# EAGLE board da7_pcb (EAGLE 9.3.2)
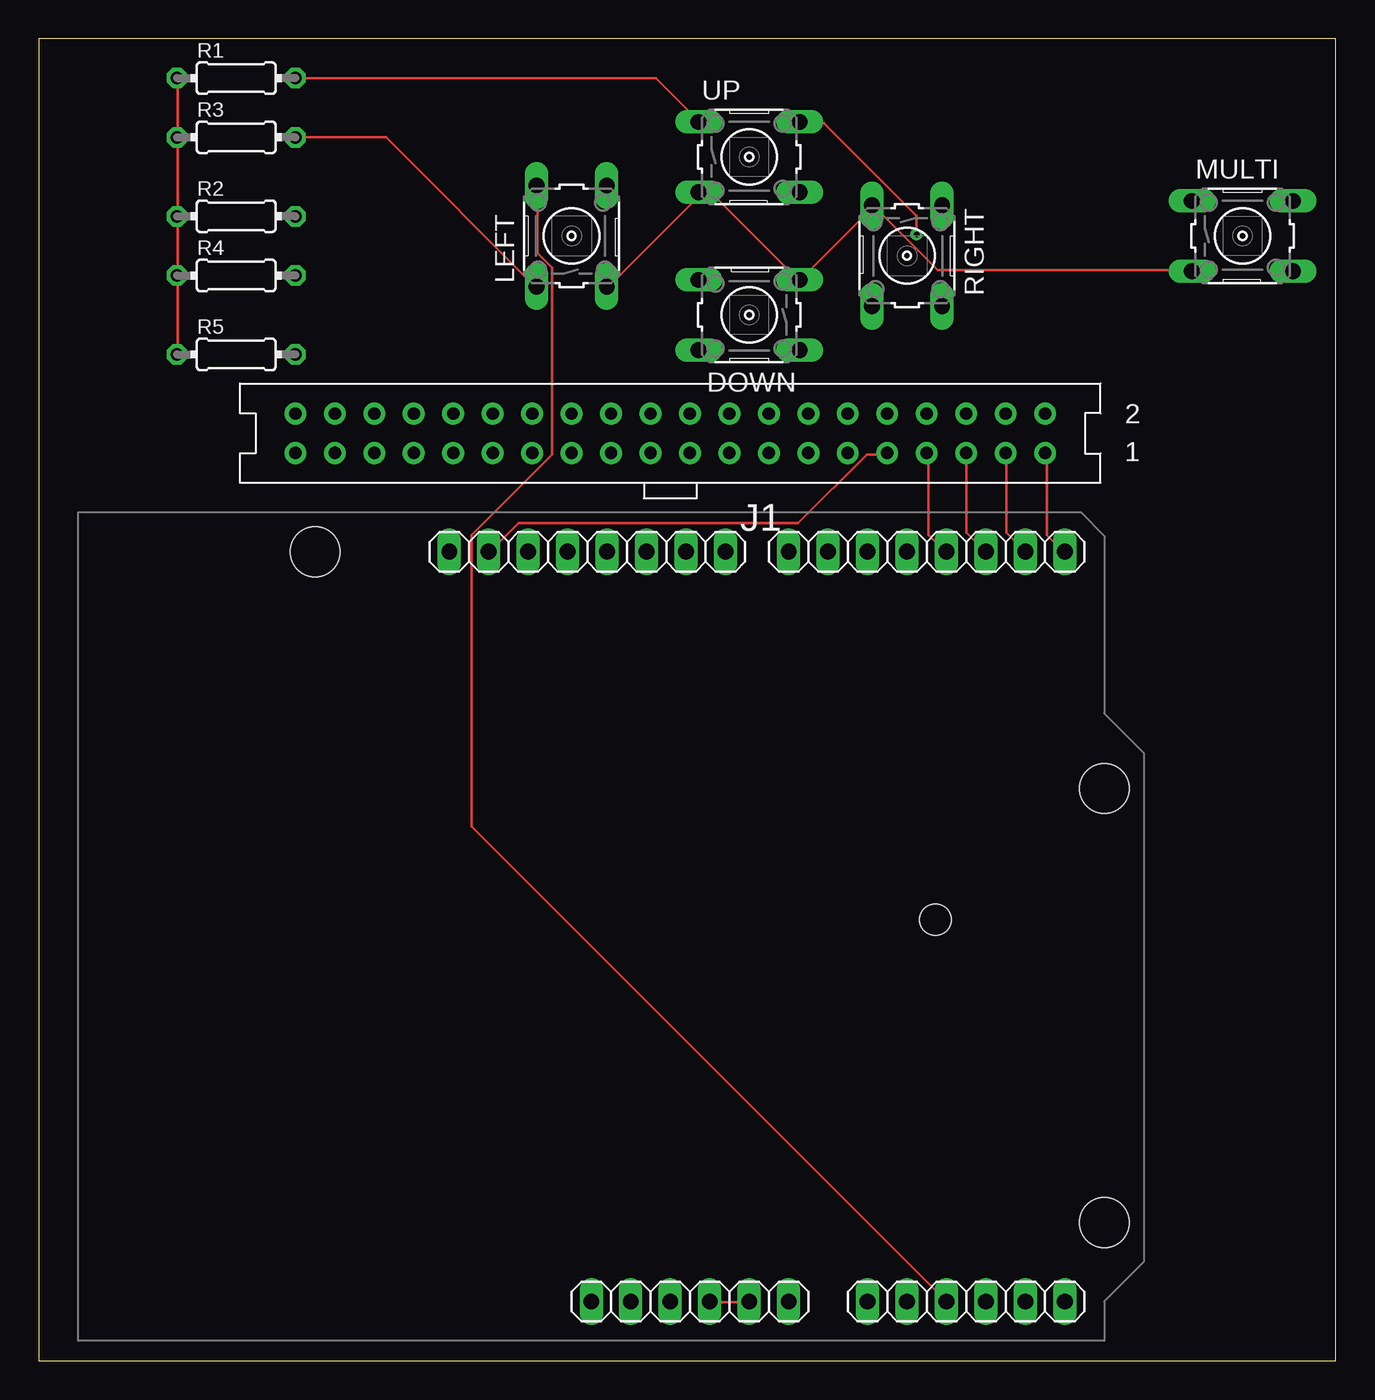
[diagram p0: board, top side]
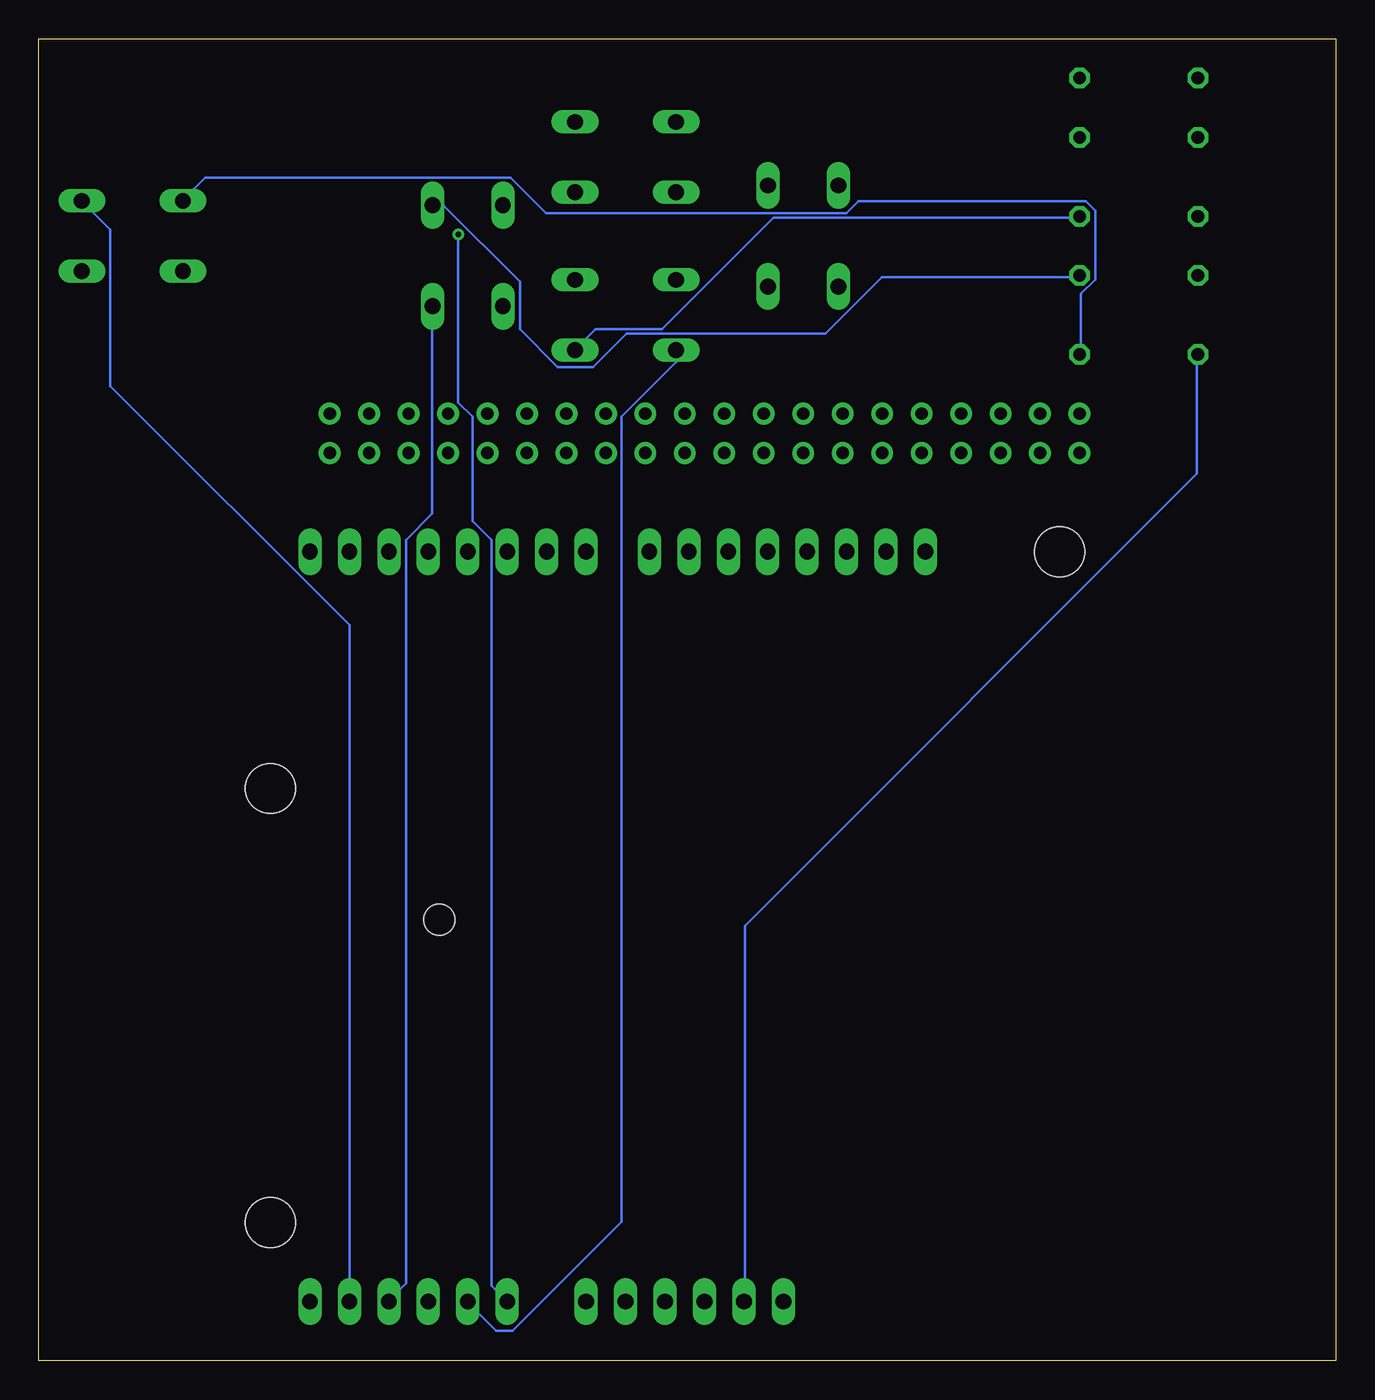
[diagram p1: board, bottom side, seen from below]

Size 83.49 x 85.08 mm. Coordinates in mm from the lower left corner, seen from the top.
Outline: 0,0 83.49,0 83.49,85.08 0,85.08 0,0
Copper layers (1*16): Top 0.035mm / dielectric 1.5mm / Bottom 0.035mm
Design rules "default": minimum track width 6mil, minimum drill 0.35mm, track to track 6mil, track to pad 6mil, pad to pad 6mil, via to via 6mil, smd to smd 6mil, copper to edge 40mil, drill to drill 6mil, minimum pad ring 10mil, minimum via ring 8mil, stop-mask expansion 4mil, vias tented up to drill 0mil, thermal gap 10mil

## Footprints (pad centres in the part's own frame; a part is rotated, then mirrored left to right if it is on the bottom)
B3F-10XX = drill 1.016 long: 1 -3.251,2.261; 2 3.251,2.261; 3 -3.251,-2.261; 4 3.251,-2.261
ARDUINO2009 = drill 1.016 long: 1 33.02,2.54; 2 35.56,2.54; 3 38.1,2.54; 4 40.64,2.54; 5 43.18,2.54; 6 45.72,2.54; 7 50.8,2.54; 8 53.34,2.54; 9 55.88,2.54; 10 58.42,2.54; 11 60.96,2.54; 12 63.5,2.54; 13 63.5,50.8; 14 60.96,50.8; 15 58.42,50.8; 16 55.88,50.8; 17 53.34,50.8; 18 50.8,50.8; 19 48.26,50.8; 20 45.72,50.8; 21 41.656,50.8; 22 39.116,50.8; 23 36.576,50.8; 24 34.036,50.8; 25 31.496,50.8; 26 28.956,50.8; 27 26.416,50.8; 28 23.876,50.8 | hole 3.2: 15.24,50.8; 66.04,35.56; 66.04,7.62 | hole 2: 55.17,27.114
S40V = drill 0.8 pad 1.4: 1 24.13,-1.27; 2 24.13,1.27; 3 21.59,-1.27; 4 21.59,1.27; 5 19.05,-1.27; 6 19.05,1.27; 7 16.51,-1.27; 8 16.51,1.27; 9 13.97,-1.27; 10 13.97,1.27; 11 11.43,-1.27; 12 11.43,1.27; 13 8.89,-1.27; 14 8.89,1.27; 15 6.35,-1.27; 16 6.35,1.27; 17 3.81,-1.27; 18 3.81,1.27; 19 1.27,-1.27; 20 1.27,1.27; 21 -1.27,-1.27; 22 -1.27,1.27; 23 -3.81,-1.27; 24 -3.81,1.27; 25 -6.35,-1.27; 26 -6.35,1.27; 27 -8.89,-1.27; 28 -8.89,1.27; 29 -11.43,-1.27; 30 -11.43,1.27; 31 -13.97,-1.27; 32 -13.97,1.27; 33 -16.51,-1.27; 34 -16.51,1.27; 35 -19.05,-1.27; 36 -19.05,1.27; 37 -21.59,-1.27; 38 -21.59,1.27; 39 -24.13,-1.27; 40 -24.13,1.27
0204/7 = drill 0.813 octagon: 1 -3.81,0; 2 3.81,0

## Placement (x,y rotation side)
DOWN  [B3F-10XX]  45.72,67.31 180 top
IC2  [ARDUINO2009]  2.54,1.27 0 top
J1  [S40V]  40.64,59.69 0 top
LEFT  [B3F-10XX]  34.29,72.39 90 top
MULTI  [B3F-10XX]  77.47,72.39 0 top
R1  2k  [0204/7]  12.7,82.55 0 top
R2  27k  [0204/7]  12.7,73.66 0 top
R3  27k  [0204/7]  12.7,78.74 0 top
R4  27k  [0204/7]  12.7,69.85 0 top
R5  27k  [0204/7]  12.7,64.77 0 top
RIGHT  [B3F-10XX]  55.88,71.12 270 top
UP  [B3F-10XX]  45.72,77.47 0 top

## Library data of the parts
DOWN LEFT MULTI RIGHT UP = switch-omron; MPN: B3F-1000; OC_FARNELL: 176432; OC_NEWARK: 36M3542
IC2 = arduino
J1 = con-3m-skt-header (1)
R1-R5 = rcl; SPICEPREFIX: R

## Nets
+5V: IC2.3
GND: IC2.4 IC2.5
N$1: IC2.13 J1.1
N$2: IC2.14 J1.3
N$3: IC2.15 J1.5
N$4: IC2.16 J1.7
N$5: IC2.27 J1.9
N$6: R1.2 UP.1
N$7: DOWN.1 R2.2
N$8: LEFT.1 R3.2
N$9: R4.2 RIGHT.1
N$10: MULTI.1 R5.2
N$11: IC2.2 R1.1 R2.1 R3.1 R4.1 R5.1
N$12: IC2.7 UP.2
N$13: DOWN.2 IC2.8
N$14: IC2.9 LEFT.2
N$15: IC2.10 RIGHT.2
N$16: IC2.11 MULTI.2
N$17: DOWN.3 LEFT.3 MULTI.3 RIGHT.3 UP.3

## Tracks (layer width: path | path; a pad name or v marks a point on that pad's centre or on a via)
GND
  Top 0.152: IC2.4 43.23,3.76 45.67,3.76 IC2.5
N$1
  Top 0.152: J1.1 64.87,58.32 64.87,53.14 65.94,52.07 IC2.13
N$2
  Top 0.152: IC2.14 62.28,53.29 62.28,58.32 J1.3
N$3
  Top 0.152: J1.5 59.69,53.29 60.91,52.07 IC2.15
N$4
  Top 0.152: J1.7 57.25,58.32 57.25,53.14 58.32,52.07 IC2.16
N$5
  Top 0.152: J1.9 54.51,58.32 53.29,58.32 48.87,53.9 30.89,53.9 29.06,52.07 IC2.27
N$6
  Top 0.152: R1.2 39.73,82.55 42.47,79.81 UP.1
N$7
  Bottom 0.152: R2.2 16.56,73.56 36.22,73.56 43.38,66.4 47.65,66.4 48.87,65.18 DOWN.1
N$8
  Top 0.152: R3.2 22.35,78.74 31.95,69.14 LEFT.1
N$9
  Bottom 0.152: R4.2 16.56,69.75 29.21,69.75 32.87,66.09 45.67,66.09 47.8,63.96 50.09,63.96 52.53,66.4 52.53,69.44 57.4,74.32 58.01,74.32 RIGHT.1
N$10
  Bottom 0.152: R5.2 16.41,64.87 16.41,68.68 15.49,69.6 15.49,74.02 16.1,74.62 30.73,74.62 31.5,73.86 50.85,73.86 53.14,76.15 72.8,76.15 74.17,74.78 MULTI.1
N$11
  Top 0.152: 8.94,78.74 8.94,82.55 R1.1 | R5.1 8.94,64.87 8.94,69.75 R4.1 8.94,69.9 8.94,73.56 R2.1 8.94,73.71 8.94,78.74 | 8.94,78.74 R3.1
  Bottom 0.152: IC2.2 38.05,3.91 38.05,27.99 8.94,57.1 8.94,64.72 R5.1
N$12  (via drill 0.35)
  Top 0.152: v56.49,72.49 56.49,73.71 50.55,79.65 49.02,79.65 UP.2
  Bottom 0.152: v56.49,72.49 56.49,61.67 55.57,60.76 55.57,54.05 54.36,52.83 54.36,4.83 IC2.7
N$13
  Bottom 0.152: DOWN.2 42.47,64.26 45.97,60.76 45.97,8.94 52.98,1.93 54.05,1.93 55.88,3.76 IC2.8
N$14
  Top 0.152: IC2.9 27.84,34.39 27.84,53.14 33.02,58.32 33.02,70.36 32.11,71.27 32.11,75.54 LEFT.2
N$15
  Bottom 0.152: RIGHT.2 58.17,67.77 58.17,54.51 59.84,52.83 59.84,4.98 60.91,3.91 IC2.10
N$16
  Bottom 0.152: IC2.11 63.5,47.35 78.89,62.74 78.89,72.8 80.72,74.62 MULTI.2
N$17
  Top 0.152: 42.47,74.93 36.68,69.14 LEFT.3 | 42.47,74.93 UP.3 42.47,75.08 | 53.75,74.32 49.02,69.6 DOWN.3 48.87,69.6 43.54,74.93 42.47,74.93 | 53.75,74.32 57.86,70.21 74.17,70.21 MULTI.3 | 53.75,74.32 RIGHT.3